# Altium PCB ThrowBot_RX_Main_Board.PcbDoc
Units mil, origin at the board's own origin, x right, y up, seen from the top; angles counter-clockwise.
Board outline 3975.31 x 895.03 mil, 2 copper layers (Top Layer, Bottom Layer); 55 components, 48 nets, 202 pads, 73 vias.
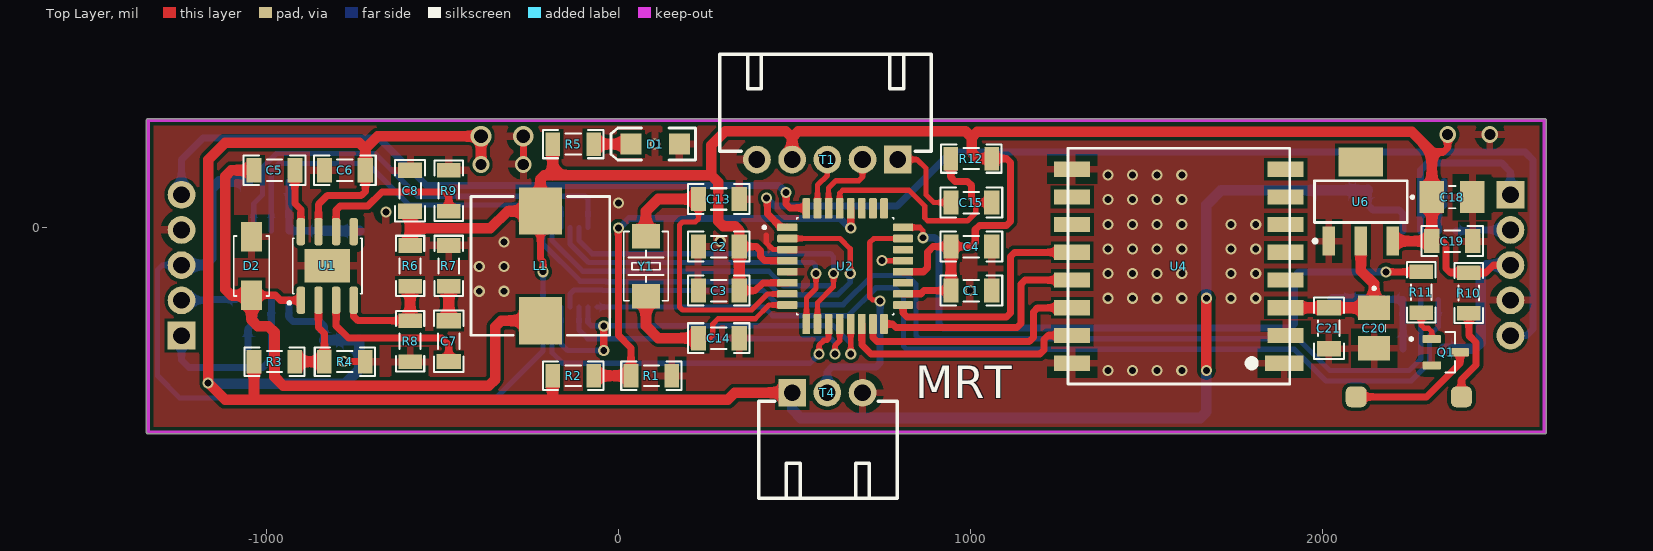
[diagram p0: Top Layer view]
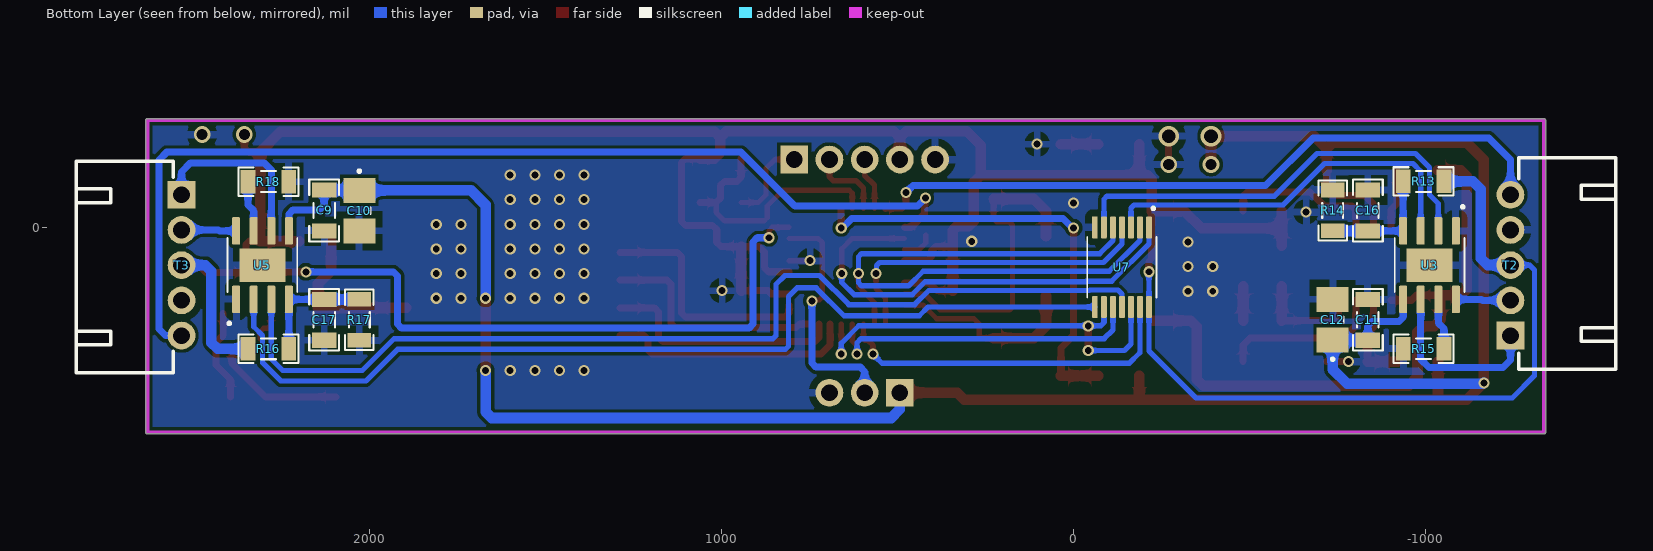
[diagram p1: Bottom Layer view, seen from below]
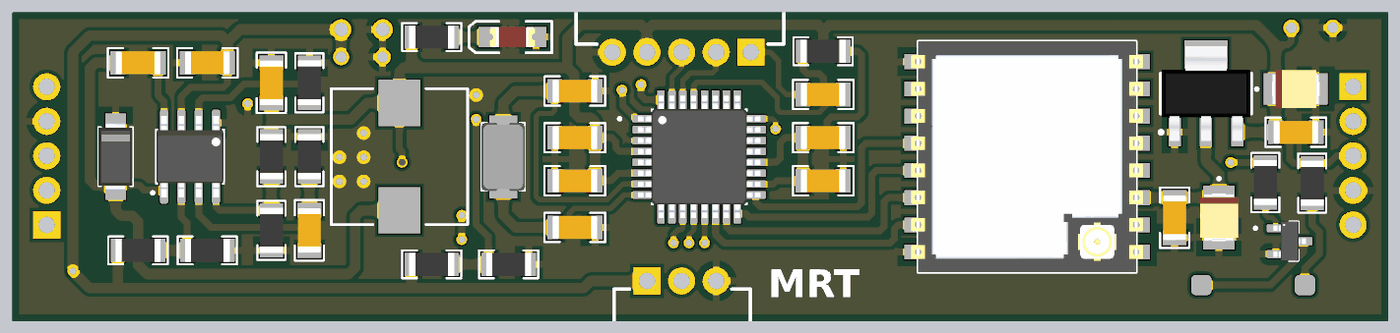
[diagram p2: 3D render of the assembled board from above, using the file's embedded part models]
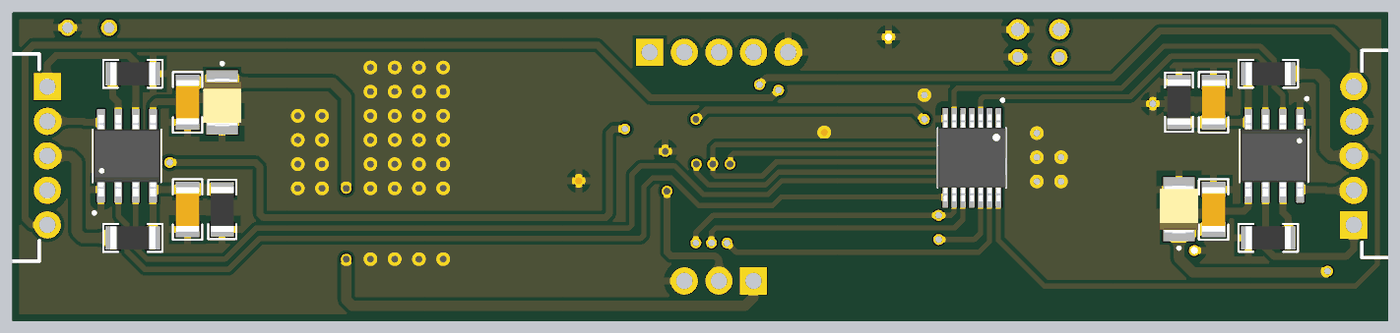
[diagram p3: 3D render of the assembled board from below, using the file's embedded part models]

## Layer stack, top to bottom
Top Solder: solder mask 0.4, Solder Resist, Dk 3.5
Top Layer: signal copper 1.4
Dielectric 1: dielectric 12.6, FR-4, Dk 4.8
Bottom Layer: signal copper 1.4
Bottom Solder: solder mask 0.4, Solder Resist, Dk 3.5

## Board outline
-1335.28,-585.01 cw(c-1335.28,-580) -1340.29,-580 -1340.29,305 cw(c-1335.28,305) -1335.28,310.02 2630,310.02 cw(c2630,305) 2635.01,305 2635.01,-580 cw(c2630,-580) 2630,-585.01

## Design rules (kind name [scope] priority, off if disabled: settings)
Clearance [All] p1: gap=10 ignorepadtopadclearanceinfootprint=FALSE except(0: Arc-Hole Track-Hole SMDPad-Hole THPad-Hole Via-Hole Fill-Hole Poly-Hole Region-Hole Text-Hole; 5: SMDPad-SMDPad)
ComponentClearance [All] p1: gap=0 collisioncheckmode=3 verticalgap=0 showdistances=FALSE
MinimumSolderMaskSliver [All] p1: minsoldermaskwidth=0
PolygonConnect [All] p1: connectstyle=Relief reliefconductorwidth=20 reliefentries=4 polygonreliefangle="90 Angle" airgapwidth=20
RoutingVias [All] p1: holewidth=31.5 width=31.5 viastyle="Through Hole" minholewidth=19.68 minwidth=19.68 maxholewidth=78.74 maxwidth=78.74
SilkToSolderMaskClearance [IsPad] p1: minsilkscreentomaskgap=0 clearancetoexposedcopper=TRUE
SolderMaskExpansion [All] p1: expansion=4 istentingtop=FALSE
UnpouredPolygon [All] p1: allowunpoured=TRUE
Width [All] p1: maxlimit=50 minlimit=5 preferedwidth=30
26 further rules are at their usual default settings.

## Components (designator, comment, footprint, x,y, rotation, side; value= is the part's Value field where it differs from the comment)
C1 "Cap" "CAP 1206" 1002.43,-178.15 r0 top
C2 "Cap" "CAP 1206" 285.35,-53.15 r180 top
C3 "Cap" "CAP 1206" 285.35,-178.15 r180 top
C4 "Cap" "CAP 1206" 1002.43,-53.15 r0 top
C5 "Cap" "CAP 1206" -976.57,163.5 r0 top
C6 "Cap" "CAP 1206" -776.57,163.5 r0 top
C7 "Cap" "CAP 1206" -481.57,-321.73 r270 top
C8 "Cap" "CAP 1206" -591.57,105.43 r270 top
C9 "Cap" "CAP 1206" 2128.43,49.41 r270 bottom
C10 "Cap BiPolar" "CAP Tantalum Size B" 2028.43,48.82 r270 bottom
C11 "Cap" "CAP 1206" -835.57,-261.22 r90 bottom
C12 "Cap BiPolar" "CAP Tantalum Size B" -735.57,-260.63 r90 bottom
C13 "Cap" "CAP 1206" 285.35,81.85 r180 top
C14 "Cap" "CAP 1206" 285.35,-313.15 r180 top
C15 "Cap" "CAP 1206" 1002.43,71.85 r180 top
C16 "Cap" "CAP 1206" -835.57,49.41 r90 bottom
C17 "Cap" "CAP 1206" 2128.43,-261.22 r270 bottom
C18 "Cap BiPolar" "CAP Tantalum Size B" 2367.46,87.44 r0 top
C19 "Cap" "CAP 1206" 2368.05,-37.56 r0 top
C20 "Cap BiPolar" "CAP Tantalum Size B" 2145.98,-284.49 r270 top
C21 "Cap" "CAP 1206" 2017.87,-285.08 r270 top
D1 "LED" "LED 1206" 104.72,237.99 r180 top
D2 "SS34" SS34 -1041.57,-108.15 r270 top
L1 "Inductor" "IND 10uH" -221.57,-108.15 r90 top value=10uH
Q1 "BC847" BC847-SOT23 2350,-353.07 r0 top
R1 "Resistor" "RES 1206" 93.9,-420 r180 top
R2 "Resistor" "RES 1206" -128.35,-420 r180 top
R3 "Resistor" "RES 1206" -976.57,-379.8 r180 top
R4 "Resistor" "RES 1206" -776.57,-379.8 r0 top
R5 "Resistor" "RES 1206" -128.35,237.99 r180 top
R6 "Resistor" "RES 1206" -591.57,-108.15 r90 top
R7 "Resistor" "RES 1206" -481.57,-108.15 r270 top
R8 "Resistor" "RES 1206" -591.57,-321.73 r90 top
R9 "Resistor" "RES 1206" -481.57,105.43 r270 top
R10 "Resistor" "RES 1206" 2415,-185 r90 top
R11 "Resistor" "RES 1206" 2280,-183.07 r270 top
R12 "Resistor" "RES 1206" 1002.43,196.85 r0 top
R13 "Resistor" "RES 1206" -993.65,131.85 r180 bottom
R14 "Resistor" "RES 1206" -735.57,49.41 r270 bottom
R15 "Resistor" "RES 1206" -993.65,-343.15 r180 bottom
R16 "Resistor" "RES 1206" 2286.5,-343.66 r0 bottom
R17 "Resistor" "RES 1206" 2028.43,-261.22 r90 bottom
R18 "Resistor" "RES 1206" 2286.5,131.34 r0 bottom
T1 "5 Pin Socket" XH-5AW 793.43,194.09 r180 top
T2 "5 Pin Socket" XH-5AW -1240.57,-305.91 r90 bottom
T3 "5 Pin Socket" XH-5AW 2533.43,94.09 r270 bottom
T4 "3 Pin Socket" XH-3AW 693.43,-468.15 r0 top
U1 "MP1584EN" MP1584EN -826.57,-108.15 r90 top
U2 "ATMEGA328P-AU" ATmega328 644.25,-108.9 r0 top
U3 "TB67H450FNG" TB67H450FNG -1010.57,-105.91 r270 bottom
U4 "RA-02" RA-02 1591.57,-108.9 r180 top
U5 "TB67H450FNG" TB67H450FNG 2303.43,-105.91 r90 bottom
U6 "AMS1117" AMS1117 2108.43,74.65 r90 top
U7 "TMUX1511PWR" TMUX1511PWR -137.17,-111.73 r270 bottom
Y1 "XTAL" Crystal-5032 78.43,-108.9 r270 top

## Footprints (in the part's own frame and the unit in brackets; to place one, negate y for a bottom-side part, rotate by r counter-clockwise, add the part's x,y. Pads: shape width x height; smd on the part's side, far side on the other; paste and mask are expansions set on the pad)
AMS1117 [mm]
  rect 2.1x0.9 smd: 1(-2.85,2.3) 2(-2.85,0) 3(-2.85,-2.3)
  rect 2.1x3.2 smd: 4(2.85,0)
  silkscreen extent -2.97,-3.35 1.5,3.42, body extent -3.49,-3.24 3.49,3.24, height 1.64
ATmega328 [mm]
  rrect25% 1.47x0.55 smd: 1(-4.17,2.8) 2(-4.17,2) 3(-4.17,1.2) 4(-4.17,0.4) 5(-4.17,-0.4) 6(-4.17,-1.2) 7(-4.17,-2) 8(-4.17,-2.8) 17(4.17,-2.8) 18(4.17,-2) 19(4.17,-1.2) 20(4.17,-0.4) 21(4.17,0.4) 22(4.17,1.2) 23(4.17,2) 24(4.17,2.8)
  rrect25% 0.55x1.47 smd: 9(-2.8,-4.17) 10(-2,-4.17) 11(-1.2,-4.17) 12(-0.4,-4.17) 13(0.4,-4.17) 14(1.2,-4.17) 15(2,-4.17) 16(2.8,-4.17) 25(2.8,4.17) 26(2,4.17) 27(1.2,4.17) 28(0.4,4.17) 29(-0.4,4.17) 30(-1.2,4.17) 31(-2,4.17) 32(-2.8,4.17)
  silkscreen extent -5.94,-3.5 3.5,3.5, body extent -4.5,-4.5 4.5,4.5, height 1.2
BC847-SOT23 [mm]
  rrect25% 1.32x0.59 smd: 1(-1.015,0.95) 2(-1.015,-0.95) 3(1.015,0)
  silkscreen extent -2.6,-1.46 0.65,1.46, body extent -1.18,-1.45 1.18,1.45, height 1.3
"CAP 1206" [mm]
  rect 1.1x1.75 smd: 1(-1.475,0) 2(1.475,0)
  silkscreen extent -2.22,-1.07 2.22,1.07, body extent -1.65,-0.85 1.65,0.85, height 0.94
"CAP Tantalum Size B" [mm]
  rect 1.79x2.31 smd: 1(-1.46,0) 2(1.46,0)
  silkscreen extent -2.95,-0.8 0.25,0.8, body extent -1.75,-1.4 1.75,1.4, height 2.1
Crystal-5032 [mil]
  rect 70x80 smd: 1(-85,0) 2(85,0)
  silkscreen extent -98,-63 98,63, body extent -98,-63 98,63, height 59
"IND 10uH" [mm]
  rect 3.4x3.1 smd: 1(-3.95,0) 2(3.95,0)
  silkscreen extent -5,-5 5,5, body extent -5,-5 5,5, height 3.5
"LED 1206" [mm]
  rect 1.5x1.5 smd: 1(-1.75,0) 2(1.75,0)
  silkscreen extent -2.9,-1.15 3.2,1.15, body extent -1.65,-0.72 1.65,0.73, height 1.36
MP1584EN [mm]
  rrect54% 1.97x0.6 smd: 1(-2.475,1.905) 2(-2.475,0.635) 3(-2.475,-0.635) 4(-2.475,-1.905) 5(2.475,-1.905) 6(2.475,-0.635) 7(2.475,0.635) 8(2.475,1.905)
  rect 2.41x3.3 smd paste-3: 9(0,0)
  silkscreen extent -2.77,-2.5 2,2.84, body extent -3,-2.45 3,2.45, height 1.7
RA-02 [mm]
  rect 2.8x1.1 smd: 1(-7.6,7)
  rect 2.6x1.1 smd: 2(-7.7,5) 3(-7.7,3) 4(-7.7,1) 5(-7.7,-1) 6(-7.7,-3) 7(-7.7,-5) 8(-7.7,-7) 9(7.7,-7) 10(7.7,-5) 11(7.7,-3) 12(7.7,-1) 13(7.7,1) 14(7.7,3) 15(7.7,5) 16(7.7,7)
  silkscreen extent -8,-8.5 8,8.5, body extent -8.5,-8.51 8.5,8.49, height 3.3
"RES 1206" [mm]
  rect 1.05x1.7 smd: 1(-1.475,0) 2(1.475,0)
  silkscreen extent -2.17,-1.02 2.17,1.02, body extent -1.65,-0.85 1.65,0.85, height 0.94
SS34 [mm]
  rect 2.12x1.5 smd: 1(-2.115,0) 2(2.115,0)
  silkscreen extent -2.16,-1.28 2.16,1.28, body extent -2.47,-1.25 2.47,1.25, height 2.2
TB67H450FNG [mm]
  rrect25% 1.97x0.58 smd: 1(-2.47,1.905) 2(-2.47,0.635) 3(-2.47,-0.635) 4(-2.47,-1.905) 5(2.47,-1.905) 6(2.47,-0.635) 7(2.47,0.635) 8(2.47,1.905)
  rect 2.413x3.302 smd paste-3: 9(0,0)
  silkscreen extent -4.3,-2.51 1.95,2.51, body extent -3,-2.45 3,2.45, height 1.75
TMUX1511PWR [mm]
  rrect25% 1.57x0.41 smd: 1(-2.87,1.95) 2(-2.87,1.3) 3(-2.87,0.65) 4(-2.87,0) 5(-2.87,-0.65) 6(-2.87,-1.3) 7(-2.87,-1.95) 8(2.87,-1.95) 9(2.87,-1.3) 10(2.87,-0.65) 11(2.87,0) 12(2.87,0.65) 13(2.87,1.3) 14(2.87,1.95)
  silkscreen extent -4.34,-2.5 2.2,2.5, body extent -3.2,-2.5 3.2,2.5, height 1.2
XH-3AW [mm]
  rect 2x2 hole 1.2 paste-2539.97 mask+0.051: 1(-5.08,0)
  round 2 hole 1.2 paste-2539.97 mask+0.051: 2(-2.54,0) 3(0,0)
  silkscreen extent -7.5,-7.6 2.5,-0.6
XH-5AW [mm]
  rect 2x2 hole 1.2 paste-2539.97 mask+0.051: 1(0,0)
  round 2 hole 1.2 paste-2539.97 mask+0.051: 2(2.54,0) 3(5.08,0) 4(7.62,0) 5(10.16,0)
  silkscreen extent -2.42,-7.6 12.83,-0.59

## Part data
C1: "AVCC Cap", Val-1=100nF, Val-2=22pF, Val-3=22uF
C2 C3: "VCC Cap", Val-1=100nF, Val-2=22pF, Val-3=22uF
C4: "AREF Cap", Val-1=100nF, Val-2=22pF, Val-3=22uF
C5 C6 C7 C8 C13 C14: "1206 Capacitor", Val-1=100nF, Val-2=22pF, Val-3=22uF
  C5: Val-4=10uF50V
  C6 C7 C8: Val-4=10uF, Val-5=150pF
C9 C10 C11 C12: "Motor Power Cap"
  C9 C11: Val-1=100nF, Val-2=22pF, Val-3=22uF
  C10 C12: Val-1=10uF, Val-2=100uF, Val-3=1000uF
C15: "Programmer Cap", Val-1=100nF, Val-2=22pF, Val-3=22uF
C16 C17: "Motor Driver Cap", Val-1=100nF, Val-2=22pF, Val-3=22uF
C18 C19 C20 C21: "3.3V Regulator Cap"
  C18: Val-1=10uF, Val-2=100uF, Val-3=1000uF
  C19 C21: Val-1=100nF, Val-2=22pF, Val-3=22uF
  C20: Val-1=22uF, Val-2=100uF, Val-3=1000uF
D1: Color-1=Blue, Color-2=Red, Color-3=Green, Color-4=White
D2: "Diode Schottky 40 V 3A Surface Mount SMA", Package=None, Check_prices=https://www.snapeda.com/parts/SS34/MDD/view-part/?ref=eda, MF=MDD, MP=SS34, SnapEDA_Link=https://www.snapeda.com/parts/SS34/MDD/view-part/?ref=snap
Q1: "NPN General-purpose Transistor", Data=27-12-2016, Desc.="Plastic Medium-Power. Silicon NPN Transistors", Designer="Abbas Basereh"
U1: "Buck Switching Regulator IC Positive Adjustable 0.8V 1 Output 3A 8-SOIC (0.154, 3.90mm Width) Exposed Pad", Package="SOIC-8 Monolithic Power", Availability="In Stock", Check_prices=https://www.snapeda.com/parts/MP1584EN/Monolithic+Power+Systems+Inc./view-part/?ref=eda, MF="Monolithic Power", MP=MP1584EN, Price=None, Purchase-URL=https://pricing.snapeda.com/search/part/MP1584EN/?ref=eda, SnapEDA_Link=https://www.snapeda.com/parts/MP1584EN/Monolithic+Power+Systems+Inc./view-part/?ref=snap
U2: "ATmega 328 Microcontroller"
U3 U5: "Motor Driver"
U4: "LoRa RA-02"
U6: "3V3 Regulator"
U7: Package=None, Availability=Unavailable, MP=TMUX1511PWR, Price=None
Y1: "XTAL Crystal", Val-1="12 MHz", Val-2="16 MHz"
L1: Code_IEC=1005, Code_JEITA=0402, LatestRevisionDate=29-May-2009, LatestRevisionNote="IPC-7351 Footprint Added.", PackageDescription="Chip Inductor", PackageReference=0402-A, Published=8-Jun-2000, Publisher="Altium Limited"
R1 R2 R10 R11: Val-1=1K, Val-2=10K, Val-3=220R, Val-4=100K, Val-5=24.9K, Val-6=8.2K, Val-7=43K, Val-8=150R, Val-9=100m, Val-10=6K, Val-11=4K, Val-12=1.2K
R3 R4 R6 R7 R8 R9: Val-1=1K, Val-2=10K, Val-3=220R, Val-4=100K, Val-5=24.9K, Val-6=8.2K, Val-7=43K
R5 R12: Val-1=1K, Val-2=10K, Val-3=220R
R13 R16: Val-1=1K, Val-2=10K, Val-3=220R, Val-4=100K, Val-5=24.9K, Val-6=8.2K, Val-7=43K, Val-8=150R, Val-9=100m, Val-10=6K, Val-11=2K
R14 R17: Val-1=1K, Val-2=10K, Val-3=220R, Val-4=100K, Val-5=24.9K, Val-6=8.2K, Val-7=43K, Val-8=150R, Val-9=100m, Val-10=3K, Val-11=4K
R15 R18: Val-1=1K, Val-2=10K, Val-3=220R, Val-4=100K, Val-5=24.9K, Val-6=8.2K, Val-7=43K, Val-8=150R, Val-9=100m, Val-10=6K, Val-11=4K

## Free pads (board coordinates)
  rrect50% 59.06x59.06 smd: 1(2095,-480) 2(2394.21,-480)

## Via types
v1: diameter 31.5, hole 19.68, Top Layer to Bottom Layer, 67 vias
v2: diameter 47.24, hole 31.5, Top Layer to Bottom Layer, 4 vias
v3: diameter 59.06, hole 39.37, Top Layer to Bottom Layer, 2 vias

## Nets (pads, with @x,y where several pads share a name; then routed paths per layer and width w, separated by ;. In a path a pad name is that pad's centre, name@x,y a point inside that pad or via, vN(x,y) a via of type N, cw(c..) or ccw(c..) an arc to the next point about the centre after c; other vN are vias at no path point)
+3V3: C20.1 C21.1 U4.3 U6.2 | length 456.3
  Top Layer w30: U4.3 C21.1 C20.1 2145.98,-159.26 2108.43,-121.71 U6.2
+5V: C1.1 C2.1 C3.1 C4.1 C8.2 C18.1 C19.1 L1.2 R5.2 R6.2 R10.2 R12.2 R13.2 R16.2 T1.4 T2.3 T3.3 U2.4 U2.6 U2.18 U2.20 U6.3 U7.14 | length 8633.9
  Top Layer w20: L1.2 -221.57,-87.48 -213.82,-95.24 v1(-213.82,-124.72) ; C2.1@342.94,-52.66 C2.1 391.71,-53.15 403.43,-64.87 403.43,-81.43 415.14,-93.15 U2.4 ; C3.1 388.43,-178.15 410.43,-156.14 U2.6 ; U2.18 858.94,-187.64 868.43,-178.15 C1.1 ; U2.20 866.71,-124.65 878.43,-112.93 878.43,-68.15 893.43,-53.15 C4.1 1001.71,-53.15 1013.43,-41.43 1013.43,-4.87 1025.14,6.85 1101.71,6.85 1113.43,18.57 1113.43,185.13 1101.71,196.85 R12.2 ; C19.1 2340,-37.56 2350,-47.56 2350,-115 2361.93,-126.93 R10.2 2463.98,-126.93 2485,-105.91 T3.3 ; 2309.98,215.44 2343.28,215.44 2355,227.16 v2(2355,265)
  Top Layer w30: R6.2 -591.57,-1.36 ; C8.2 -591.57,-1.36 ; R5.2 -186.42,149.09 ; C2.1@342.94,-52.66 342.94,-7.62 331.22,4.09 298.43,4.09 283.43,19.09 283.43,129.09 263.43,149.09 ; C3.1 C2.1 ; T1.4 493.43,256.52 ; C1.1 C4.1 ; R12.2 1020.67,196.85 1003.43,214.09 1003.43,256.52 ; U6.3 C19.1 C18.1 2309.98,215.44 2252.98,272.44 1019.35,272.44 1003.43,256.52 ; -591.57,-1.36 -363.29,-1.36 -314.57,47.36 L1.2 -221.57,137.38 -209.86,149.09 -186.42,149.09 ; -186.42,149.09 263.43,149.09 ; 263.43,149.09 263.43,234.09 303.43,274.09 475.85,274.09 493.43,256.52 ; 493.43,256.52 511,274.09 985.85,274.09 1003.43,256.52
  Bottom Layer w15: T2.3 -1295,-105.91 -1308.82,-119.72 -1308.82,-419.72 -1245.39,-483.15 -347.24,-483.15 -213.94,-349.84 U7.14 -213.94,-124.84 v1(-213.82,-124.72)
  Bottom Layer w30: T2.3 -1176.57,-105.91 -1156.57,-85.91 -1156.57,109.09 -1133.82,131.85 R13.2 ; R16.2 2430.85,-343.66 2448.43,-326.09 2448.43,-123.48 2466,-105.91 T3.3
+12V: C6.2 C9.1 C10.1 C11.1 C12.1 R2.2 R3.2 T4.1 U1.7 U3.5 U5.5 | length 7080.8
  Top Layer w20: U1.7 -851.57,66.85 -826.57,91.85 -730.22,91.85 -718.5,103.57 C6.2
  Top Layer w30: v1(-1165,-440) -1116.85,-488.15 -1035,-488.15 ; v1@-1165,-439.6 -1165,193.43 -1116.57,241.85 -736.08,241.85 -718.5,224.28 ; R3.2 -1034.65,-487.8 -1035,-488.15 ; C6.2 -718.5,224.28 ; v2(-390,180) v3(-390,260) -682.78,260 -718.5,224.28 ; R2.2 -186.42,-486.73 -185,-488.15 ; T4.1 330.87,-468.15 310.87,-488.15 -185,-488.15 ; v1(1670,-405) v1(1670,-200) ; -1035,-488.15 -185,-488.15
  Bottom Layer w20: U3.5 -935.57,-254.19 -923.86,-265.91 -847.29,-265.91 -835.57,-277.62 C11.1 ; C9.1 2128.43,65.34 2142.43,51.34 2216.71,51.34 2228.43,39.62 U5.5
  Bottom Layer w30: v1(-1165,-440) -1164.6,-440 -1161.45,-443.15 -776.57,-443.15 -735.57,-402.15 C12.1 -736.17,-318.7 -834.98,-318.7 C11.1 ; T4.1 493.43,-515 518.43,-540 1652.43,-540 1670,-522.43 v1(1670,-405) ; v1(1670,-200) 1670,65 1711.3,106.3 C10.1 2029.02,106.89 2127.83,106.89 C9.1
A1: U3.3 U7.3 | length 1108.8
  Bottom Layer w15: U3.3 -985.57,160.73 -963.49,182.81 -712.81,182.81 -595,65 -171.52,65 -162.74,56.21 U7.3
A2: U3.2 U7.6 | length 1265.2
  Bottom Layer w15: U3.2 -1035.57,69.11 -1010.57,94.11 -1010.57,171.09 -970.34,211.32 -691.32,211.32 -570,90 -94.79,90 -86,81.21 U7.6
AIN_1: U2.2 U7.1 | length 1278.9
  Top Layer w15: U2.2 628.86,-30.16 658.43,-59.72 v1(658.43,-129.72)
  Bottom Layer w15: U7.1@-213.92,1.24 -213.92,-45.48 -108.08,-151.32 -35.9,-151.32 -34.07,-153.15 421.85,-153.15 458.43,-189.72 623.43,-189.72 658.43,-154.72 v1(658.43,-129.72)
AIN_2: U2.9 U7.4 | length 947.2
  Top Layer w15: U2.9 534.02,-199.13 561.18,-171.97 v1(561.18,-129.72)
  Bottom Layer w15: U7.4 -137.15,-45.48 -84.47,-98.15 551.09,-98.15 559.88,-106.94 559.88,-128.42 v1(561.18,-129.72)
B1: U5.3 U7.11 | length 2889.4
  Bottom Layer w15: U7.11 -137.15,-187.75 -125.71,-176.32 -46.26,-176.32 -44.43,-178.15 411.5,-178.15 451.5,-218.15 638.43,-218.15 721.57,-135 820,-135 845,-160 845,-306.21 853.79,-315 1930,-315 2020,-405 2245.97,-405 2278.43,-372.54 U5.3
B2: U5.2 U7.8 | length 2811
  Bottom Layer w15: U7.8 413.43,-224.72 438.43,-249.72 651.85,-249.72 731.14,-170.43 785.43,-170.43 810,-195 810,-336.21 818.79,-345 1920,-345 2010,-435 2251.32,-435 2303.43,-382.9 2303.43,-305.92 2328.43,-280.92 U5.2
BIN_1: U2.11 U7.13 | length 1012.7
  Top Layer w15: v1(570,-358.07) 570,-333.02 583.51,-319.51 592.22,-319.51 597.01,-314.72 U2.11
  Bottom Layer w15: U7.13 -188.35,-353.7 -187.76,-354.29 -187.76,-354.61 -157.64,-384.72 543.35,-384.72 v1(570,-358.07)
BIN_2: U2.12 U7.10 | length 929.1
  Top Layer w15: v1(615,-358.07) 615.55,-357.52 615.55,-334.53 628.5,-321.57 U2.12
  Bottom Layer w15: U7.10 -111.57,-289.72 -86.57,-314.72 603.43,-314.72 615,-326.3 v1(615,-358.07)
Buzz_C: R11.1 U2.24 | length 1884.9
  Top Layer w15: U2.24 855.59,1.34 865,-8.07 v1(865,-28.07)
  Top Layer w20: v1(2180,-125) R11.1
  Bottom Layer w20: v1(865,-28.07) 898.28,-28.07 910,-39.79 910,-273.28 921.72,-285 1908.28,-285 1920,-273.28 1920,-136.72 1931.72,-125 v1(2180,-125)
EN: R3.1 R4.1 U1.2 | length 265.1
  Top Layer w20: U1.2 -851.57,-283.15 -834.65,-300.08 R4.1
  Top Layer w30: R3.1 R4.1
ENC_1: T2.5 U2.32 | length 2001.5
  Top Layer w20: v1(476.18,100.28) 476.18,68.27 487.9,56.55 533.19,56.55 533.19,56.1 U2.32
  Bottom Layer w20: T2.5 -1240.57,193.52 -1178.82,255.28 -680.28,255.28 -545,120 456.46,120 v1(476.18,100.28)
ENC_2: T3.5 U2.1 | length 2928.1
  Top Layer w20: v1(421.18,84.25) 423.38,82.05 423.38,39.93 461.97,1.34 U2.1
  Bottom Layer w20: v1(421.18,84.25) 443.58,61.85 791.8,61.85 944.76,214.8 2575.47,214.8 2597.64,192.64 2597.64,-287.36 2579.09,-305.91 T3.5
FB: R6.1 R8.2 U1.4 | length 308.6
  Top Layer w20: U1.4 -751.57,-251.95 -739.86,-263.66 R8.2
  Top Layer w30: R8.2 R6.1
GND: C1.2 C2.2 C3.2 C4.2 C6.1 C8.1 C9.2 C10.2 C11.2 C12.2 C13.1 C14.1 C16.2 C17.2 C18.2 C19.2 C20.2 C21.2 D1.1 D2.1 Q1.2 R1.1 R4.2 R7.1 R8.1 R9.1 R14.1 R15.1 R17.1 R18.1 T1.5 T2.4 T3.4 T4.3 U1.5 U1.9 U2.3 U2.5 U2.21 U3.1 U3.9 U4.1 U4.2 U4.9 U4.16 U5.1 U5.9 U6.1 U7.7 | length 292.1
  Top Layer w15: 420,-20 420,-42.55 439.1,-61.65 U2.3 ; v1(748.43,-93.15) U2.21
  Top Layer w20: v1(-780,-380) -779.8,-379.8 R4.2 ; v2(-270,180) v3(-270,260)
  other v1: 1390,-405 1460,-405 1530,-405 1600,-405 1390,-200 1460,-200 1530,-200 1600,-200 1740,-200 1810,-200 -395,-180 -325,-180 998.43,-178.15 1390,-130 1460,-130 1530,-130 1600,-130 1740,-130 1810,-130 -395,-110 -325,-110 1390,-60 1460,-60 1530,-60 1600,-60 1740,-60 1810,-60 -325,-40 289.28,-38.15 1390,10 1460,10 1530,10 1600,10 1740,10 1810,10 -660,45 0,70 1390,80 1460,80 1530,80 1600,80 1390,150 1460,150 1530,150 1600,150 103.62,237.99
  other v2: 2475,265
LED_C: T4.2 U2.23 | length 685
  Top Layer w15: v1(743.43,-208.15) 740.35,-205.08 722.41,-205.08 713.62,-196.29 713.62,-42.01 725.47,-30.16 U2.23
  Bottom Layer w20: T4.2 593.43,-407.42 605.14,-395.71 731.71,-395.71 743.43,-383.99 v1(743.43,-208.15)
MA1: T2.1 U3.6 | length 512.8
  Bottom Layer w20: T2.1 -1240.57,-375.28 -1219.24,-396.61 -1009.18,-396.61 -985.57,-373.01 U3.6
MA2: T2.2 U3.8 | length 156.1
  Bottom Layer w20: T2.2 -1161.57,-205.91 -1158.82,-203.15 U3.8
MB1: T3.1 U5.6 | length 512
  Bottom Layer w20: U5.6 2278.43,164.09 2299.13,184.8 2507.72,184.8 2533.43,159.09 T3.1
MB2: T3.2 U5.8 | length 156.1
  Bottom Layer w20: U5.8 2425.67,-8.66 2428.43,-5.91 T3.2
MISO: U2.16 U4.13 | length 659.3
  Top Layer w20: U2.16 754.57,-273.15 778.43,-273.15 788.43,-283.15 1131.71,-283.15 1143.43,-271.43 1143.43,-159.98 1155.14,-148.27 U4.13
MOSI: U2.15 U4.14 | length 691.1
  Top Layer w20: U2.15 722.99,-311.43 734.71,-323.15 1166.71,-323.15 1178.43,-311.43 1178.43,-238.72 1190.14,-227.01 U4.14
NetC5_1: C5.1 D2.2 L1.1 U1.1 | length 1842.5
  Top Layer w20: D2.2 -973.31,-191.42 -959.13,-205.59 U1.1
  Top Layer w30: C5.1 -1099,163.5 -1116.57,145.93 -1116.57,-173.84 -1099,-191.42 D2.2 -1041.57,-261.83 -1024,-279.4 -994.15,-279.4 -976.57,-296.97 -976.57,-423.15 -951.57,-448.15 -367.57,-448.15 -350,-430.58 -350,-281.24 -332.43,-263.66 L1.1
NetC5_2: C5.2 U1.8 | length 181.2
  Top Layer w20: C5.2 -918.5,68.78 -901.57,51.85 U1.8
NetC7_1: C7.1 R7.2 | length 97.4
  Top Layer w30: C7.1 R7.2
NetC7_2: C7.2 U1.3 | length 462
  Top Layer w20: U1.3 -801.57,-278.15 -766.57,-313.15 -501.57,-313.15 -481.57,-333.15 C7.2
NetC15_2: C15.2 T1.1 | length 245.5
  Top Layer w15: T1.1 848.43,194.09 873.43,169.09 873.43,94.09 895.67,71.85 C15.2
NetC16_1: C16.1 R13.1 R14.2 U3.4 | length 340.5
  Bottom Layer w20: R13.1 U3.4 C16.1
  Bottom Layer w30: C16.1 R14.2
NetC17_1: C17.1 R16.1 R17.2 U5.4 | length 340.5
  Bottom Layer w20: C17.1 U5.4 R16.1
  Bottom Layer w30: R17.2 C17.1
NetD1_2: D1.2 R5.1 | length 106.1
  Top Layer w30: R5.1 D1.2
NetLS1_N: pad.1 Q1.3 | length 366.3
  Top Layer w20: pad.1 2295,-480 2389.96,-385.04 Q1.3
NetLS1_P: pad.2 R10.1 | length 262.9
  Top Layer w20: pad.2 2394.21,-430.79 2435.94,-389.06 2435.94,-325.94 2415,-305 R10.1
NetQ1_1: Q1.1 R11.2 | length 93.5
  Top Layer w15: R11.2 2280,-276.21 2288.79,-285 2300,-285 2310,-295 Q1.1 Q1.1
NetR9_2: R9.2 U1.6 | length 449.9
  Top Layer w20: U1.6 -801.57,50.13 -789.86,61.85 -711.57,61.85 -671.57,101.85 -493.29,101.85 -481.57,90.13 R9.2
NetR15_2: R15.2 U3.7 | length 146.7
  Bottom Layer w20: R15.2 -1051.72,-286.05 -1035.57,-269.91 U3.7
NetR18_2: R18.2 U5.7 | length 146.7
  Bottom Layer w20: U5.7 2328.43,49.09 2344.57,65.24 R18.2
NSS: U2.14 U4.15 | length 705.6
  Top Layer w20: U2.14 691.5,-332.48 717.17,-358.15 1196.71,-358.15 1208.43,-346.43 1208.43,-317.46 1220.14,-305.75 U4.15
PWMA: U2.10 U7.2 U7.5 | length 1908.7
  Top Layer w15: U2.10 565.51,-212.64 611.18,-166.97 v1(611.18,-129.72)
  Bottom Layer w15: U7.2 -188.33,-35.71 -100.89,-123.15 427.21,-123.15 468.78,-164.72 602.39,-164.72 611.18,-155.94 v1(611.18,-129.72) 611.18,-81.94 602.39,-73.15 -74.12,-73.15 -111.56,-35.71 U7.5
PWMB: U2.13 U7.9 U7.12 | length 1233.5
  Top Layer w15: v1(660,-358.07) U2.13
  Top Layer w20: v1(-41.57,-348.15) v1(-41.53,-278.24)
  Bottom Layer w15: U7.12 -162.76,-329.72 -144.33,-348.15 v1(-41.57,-348.15) ; U7.9 -85.98,-269.13 -76.87,-278.24 v1(-41.53,-278.24) ; v1@-41.53,-278.15 610.08,-278.15 660,-328.07 v1(660,-358.07)
RST: C15.1 R12.1 U2.29 | length 747.2
  Top Layer w15: U2.29 628.5,98.06 637.29,106.85 825.08,106.85 870,61.93 870,28.69 878.79,19.9 991.48,19.9 1015.14,43.57 1015.14,71.85
  Top Layer w20: R12.1 944.35,143.57 956.07,131.85 991.71,131.85 1003.43,120.13 1003.43,83.57 1015.14,71.85 C15.1
RX: T1.3 U2.31 | length 150.4
  Top Layer w15: U2.31 565.51,121.18 593.43,149.09 T1.3
SCK: U2.17 U4.12 | length 677
  Top Layer w20: U2.17 808.43,-241.43 820.14,-253.15 1101.71,-253.15 1113.43,-241.43 1113.43,-81.24 1125.14,-69.53 U4.12
TX: T1.2 U2.30 | length 216.8
  Top Layer w15: U2.30 597.01,112.68 618.43,134.09 683.43,134.09 693.43,144.09 T1.2
V_Meter: R1.2 R2.1 U2.28 | length 1278.5
  Top Layer w20: v1(0,0) 0,-305 35.83,-340.83 R1.2 ; v1(660,0) U2.28
  Top Layer w30: R2.1 R1.2
  Bottom Layer w20: v1(0,0) 3.11,0 29.96,26.85 630.04,26.85 656.89,0 v1(660,0)
XTAL1: C13.2 U2.7 Y1.1 | length 913
  Top Layer w15: C13.2 227.28,25.64 218.5,16.85 182.21,16.85 173.43,8.06 173.43,-224.36 182.21,-233.15 378.43,-233.15 423.94,-187.64 U2.7
  Top Layer w30: Y1.1 78.43,46.85 113.43,81.85 C13.2
XTAL2: C14.2 U2.8 Y1.2 | length 557.6
  Top Layer w15: C14.2 259.64,-313.15 268.43,-304.36 268.43,-273.15 283.43,-258.15 388.78,-258.15 427.8,-219.13 U2.8
  Top Layer w30: Y1.2 78.43,-278.15 113.43,-313.15 C14.2
pads on no net: U2.19 U2.22 U2.25 U2.26 U2.27 U4.4 U4.5 U4.6 U4.7 U4.8 U4.10 U4.11 U6.4

## Polygon pours and split planes (outlines as drawn)
GND on Top Layer "G_Top" (solid, remove dead copper, pour order 0): -1345,315 2640,315 2640,-590 -1345,-590
GND on Bottom Layer "G_bottom" (solid, remove dead copper, pour order 1): -1345,315 2640,315 2640,-590 -1345,-590

## Keep-outs
Keep-Out Layer:
  lines w10: -1335.28,-580 2630,-580 2630,305 -1335.28,305 -1335.28,-580

## Silkscreen, mask and mechanical layers (free items; w line width, h text height)
Top Overlay:
  text "MRT" at 843.38,-515 h157.48